# Altium PCB 8bit_RAM.PcbDoc (part 2 of 2)
Units mm, origin at the board's own origin, x right, y up, seen from the top; angles counter-clockwise.
Board outline 237.42 x 196.8 mm, 2 copper layers (Top Layer, Bottom Layer); 76 components, 66 nets, 496 pads, 273 vias.
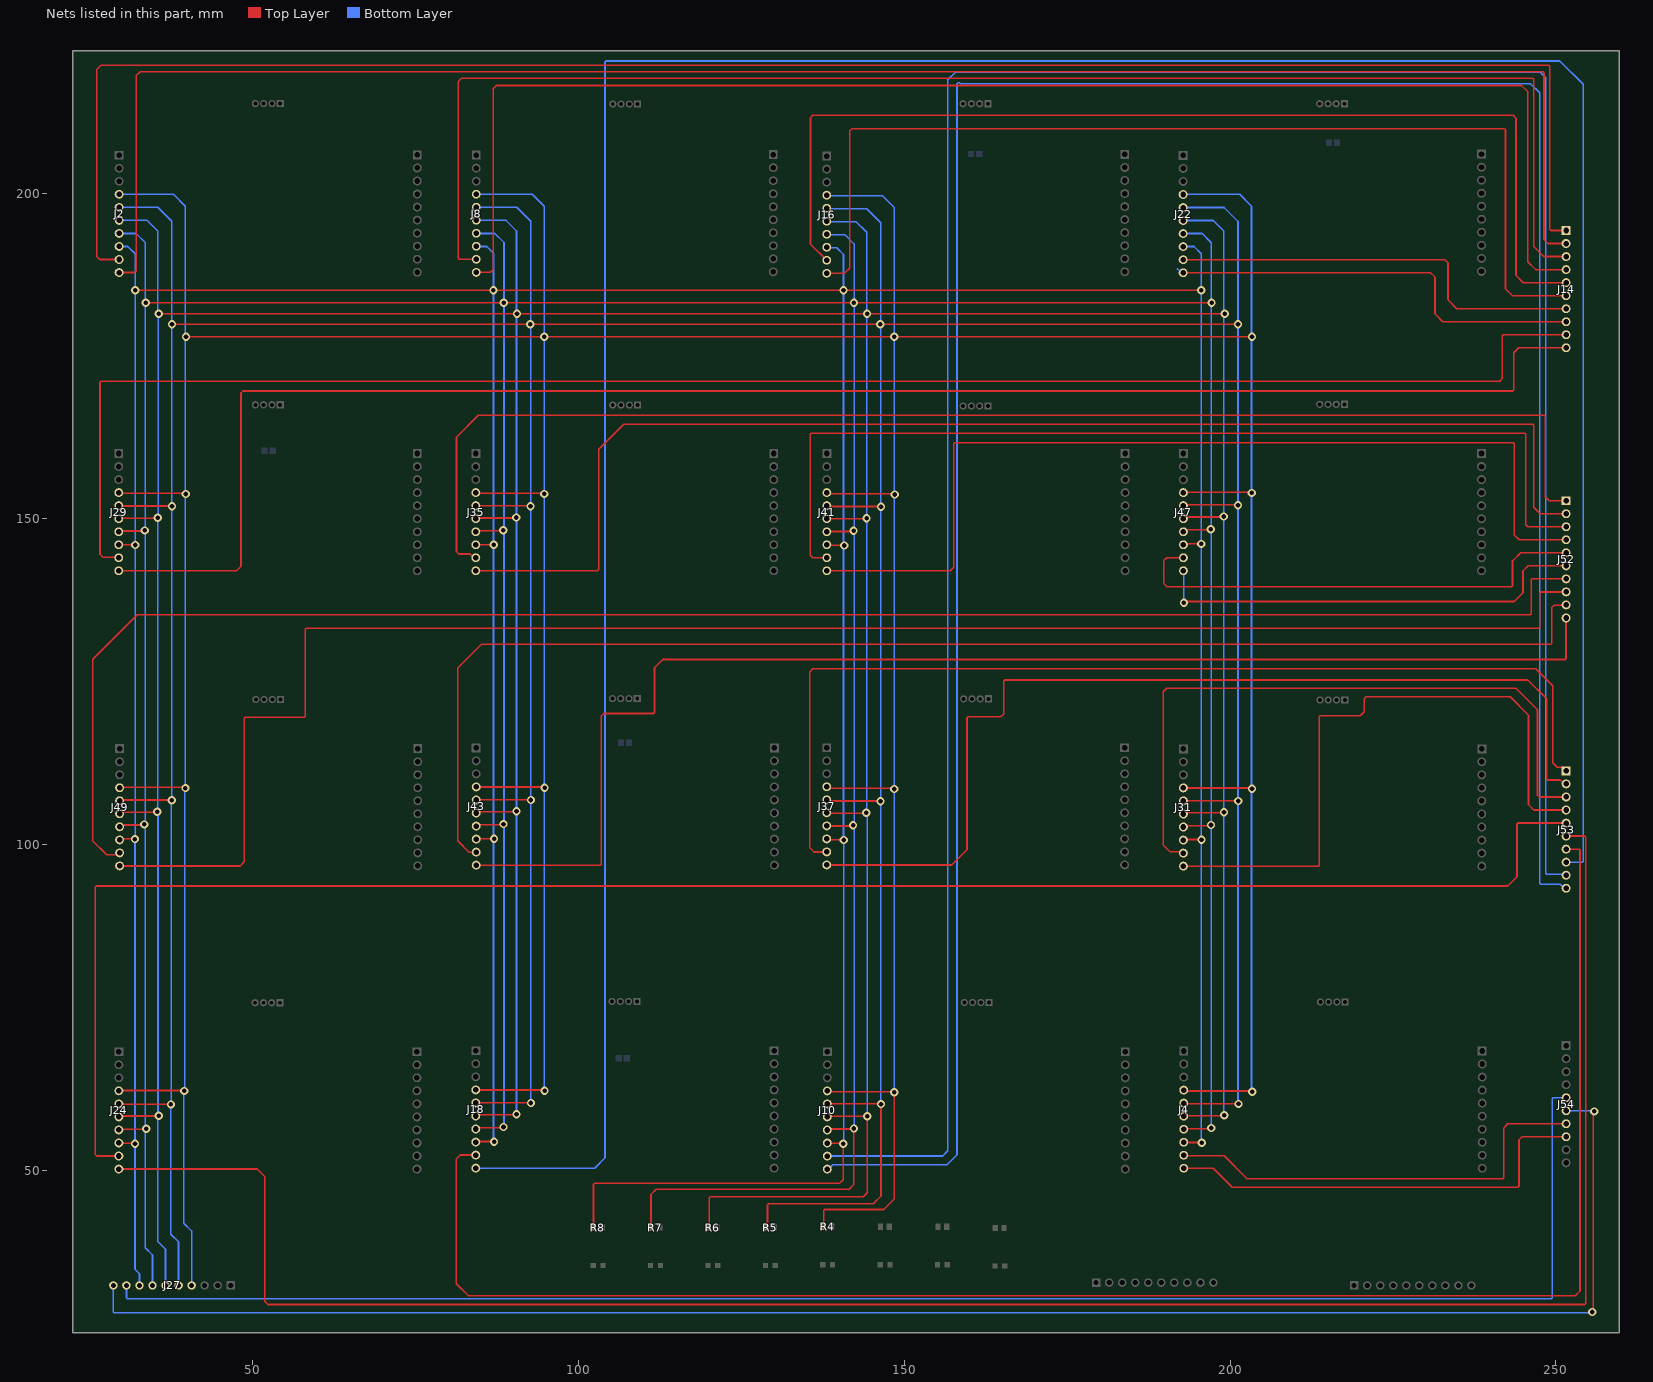
[diagram p2: the nets of this part, all layers, seen from the top]

## Via types
v1: diameter 1.27, hole 0.711, Top Layer to Bottom Layer, 273 vias

## Nets (pads, with @x,y where several pads share a name; then routed paths per layer and width w, separated by ;. In a path a pad name is that pad's centre, name@x,y a point inside that pad or via, vN(x,y) a via of type N, cw(c..) or ccw(c..) an arc to the next point about the centre after c; other vN are vias at no path point) (continued)
Q3: J2.4 J4.4 J8.4 J10.4 J16.4 J18.4 J22.4 J24.4 J27.4 J29.4 J31.4 J35.4 J37.4 J41.4 J43.4 J47.4 J49.4 R4.1 | length 935.7
  Top Layer w0.254: J49.4@29.4,108.9 29.512,108.787 39.563,108.787 v1(39.675,108.675) ; J24.4@29.475,62.2 29.525,62.25 39.45,62.25 v1(39.5,62.2) ; J29.4@29.563,153.913 39.613,153.913 v1(39.725,153.8) ; v1(39.775,177.95) v1(94.75,177.95) v1(148.475,177.95) v1(203.375,177.95) ; J35.4@84.475,154.05 84.587,153.938 94.638,153.938 v1(94.75,153.825) ; J18.4@84.525,62.45 84.637,62.337 94.687,62.337 v1(94.8,62.225) ; J43.4@84.525,108.95 84.637,108.837 94.687,108.837 v1(94.8,108.725) ; R4.1@137.551,41.35 137.625,41.424 137.625,43.851 137.774,44 146.875,44 148.475,45.6 v1(148.475,62) 148.381,62.094 J10.4@137.806,62.094 ; J37.4@138.175,108.75 138.287,108.637 148.338,108.637 v1(148.45,108.525) ; J41.4@138.25,153.95 138.362,153.837 148.413,153.837 v1(148.525,153.725) ; J47.4@193.05,154.2 193.162,154.087 203.212,154.087 v1(203.325,153.975) ; J31.4@193.1,108.8 193.212,108.688 203.262,108.688 v1(203.375,108.575) ; J4.4@193.125,62.3 193.237,62.187 203.288,62.187 v1(203.4,62.075)
  Bottom Layer w0.254: J2.4@29.5,199.8 37.85,199.8 39.675,197.975 v1(39.675,108.675) 39.556,108.556 39.556,62.256 v1(39.5,62.2) 39.438,62.137 39.438,41.887 40.625,40.7 J27.4@40.625,32.339 ; J8.4@84.575,199.8 92.925,199.8 94.75,197.975 v1@94.75,62.281 ; J16.4@138.303,199.593 146.653,199.593 148.478,197.768 v1@148.478,108.525 ; v1(148.45,108.525) 148.462,108.513 148.462,62.013 v1(148.475,62) ; J22.4@193.128,199.793 201.478,199.793 203.303,197.968 v1@203.303,62.131
Q4: J2.5 J4.5 J8.5 J10.5 J16.5 J18.5 J22.5 J24.5 J27.5 J29.5 J31.5 J35.5 J37.5 J41.5 J43.5 J47.5 J49.5 R5.1 | length 904.2
  Top Layer w0.254: J24.5@29.275,60.225 29.325,60.175 37.4,60.175 v1(37.45,60.125) ; J49.5@29.4,106.9 29.45,106.85 37.525,106.85 v1(37.575,106.8) ; J29.5@29.5,151.975 37.575,151.975 v1(37.625,151.925) ; v1(37.625,179.875) v1(92.6,179.875) v1(146.325,179.875) v1(201.225,179.875) ; J35.5@84.475,152.05 84.525,152 92.6,152 v1(92.65,151.95) ; J18.5@84.525,60.45 84.575,60.4 92.65,60.4 v1(92.7,60.35) ; J43.5@84.525,106.95 84.575,106.9 92.65,106.9 v1(92.7,106.85) ; R5.1@128.743,41.225 129.016,41.498 129.016,44.751 129.165,44.9 145.25,44.9 146.425,46.075 v1(146.425,60.175) 146.363,60.238 J10.5@137.737,60.238 ; J37.5@138.175,106.75 138.225,106.7 146.3,106.7 v1(146.35,106.65) ; J41.5@138.25,151.95 138.3,151.9 146.375,151.9 v1(146.425,151.85) ; J47.5@193.05,152.2 193.1,152.15 201.175,152.15 v1(201.225,152.1) ; J31.5@193.1,106.8 193.15,106.75 201.225,106.75 v1(201.275,106.7) ; J4.5@193.125,60.3 193.175,60.25 201.25,60.25 v1(201.3,60.2)
  Bottom Layer w0.254: J2.5@29.5,197.8 35.45,197.8 37.6,195.65 37.6,106.8 37.587,106.787 37.512,106.713 37.512,60.187 v1(37.45,60.125) 37.45,40.2 38.625,39.025 J27.5@38.625,32.339 ; J8.5@84.575,197.8 90.525,197.8 92.675,195.65 v1@92.675,60.35 ; J16.5@138.303,197.593 144.253,197.593 146.403,195.443 146.403,60.197 v1(146.425,60.175) ; J22.5@193.128,197.793 199.078,197.793 201.228,195.643 v1@201.228,60.2
Q5: J2.6 J4.6 J8.6 J10.6 J16.6 J18.6 J22.6 J24.6 J27.6 J29.6 J31.6 J35.6 J37.6 J41.6 J43.6 J47.6 J49.6 R6.1 | length 874.1
  Top Layer w0.254: J24.6@29.35,58.3 29.4,58.35 35.525,58.35 v1(35.575,58.4) ; J49.6@29.4,104.9 29.475,104.975 35.3,104.975 v1(35.375,105.05) ; J29.6@29.525,150.1 35.35,150.1 v1(35.425,150.175) ; v1(35.6,181.475) v1(90.575,181.475) v1(144.3,181.475) v1(199.2,181.475) ; J35.6@84.475,150.05 84.55,150.125 90.375,150.125 v1(90.45,150.2) ; J18.6@84.525,58.45 84.6,58.525 90.425,58.525 v1(90.5,58.6) ; J43.6@84.525,104.95 84.6,105.025 90.425,105.025 v1(90.5,105.1) ; R6.1@119.935,41.225 120.1,41.39 120.1,45.826 120.249,45.975 143.725,45.975 144.325,46.575 v1(144.325,58.325) 144.312,58.313 137.737,58.313 J10.6@137.725,58.325 ; J37.6@138.175,104.75 138.25,104.825 144.075,104.825 v1(144.15,104.9) ; J41.6@138.25,149.95 138.325,150.025 144.15,150.025 v1(144.225,150.1) ; J47.6@193.05,150.2 193.125,150.275 198.95,150.275 v1(199.025,150.35) ; J31.6@193.1,104.8 193.175,104.875 199,104.875 v1(199.075,104.95) ; J4.6@193.125,58.3 193.2,58.375 199.025,58.375 v1(199.1,58.45)
  Bottom Layer w0.254: J2.6@29.5,195.8 33.8,195.8 35.425,194.175 35.425,181.475 35.513,181.387 35.513,150.262 v1(35.425,150.175) 35.425,105.05 35.475,105 35.475,58.5 v1(35.575,58.4) 35.425,58.25 35.425,39.075 36.625,37.875 J27.6@36.625,32.339 ; J8.6@84.575,195.8 88.875,195.8 90.5,194.175 v1@90.5,150.25 ; v1(90.45,150.2) v1@90.5,150.25 ; v1(90.5,58.6) v1(90.5,105.1) v1@90.5,150.25 ; v1@90.537,150.287 v1@90.5,150.25 ; J16.6@138.303,195.593 142.603,195.593 144.228,193.968 v1@144.228,150.103 ; v1(144.225,150.1) v1@144.228,150.103 ; v1@144.312,150.188 v1@144.228,150.103 ; v1@144.325,58.55 144.325,104.725 v1(144.15,104.9) 144.228,104.978 v1@144.228,150.103 ; J22.6@193.128,195.793 197.428,195.793 199.053,194.168 v1@199.053,150.378 ; v1(199.025,150.35) v1@199.053,150.378 ; v1@199.053,58.45 v1@199.053,150.378 ; v1(199.075,104.95) v1@199.163,105.037 ; v1(199.1,58.45) v1@199.188,58.538 ; v1@199.112,150.437 v1@199.053,150.378
Q6: J2.7 J4.7 J8.7 J10.7 J16.7 J18.7 J22.7 J24.7 J27.7 J29.7 J31.7 J35.7 J37.7 J41.7 J43.7 J47.7 J49.7 R7.1 | length 844.9
  Top Layer w0.254: J24.7@29.375,56.325 29.387,56.338 33.638,56.338 v1(33.675,56.375) ; J49.7@29.4,102.9 29.5,103 33.275,103 v1(33.375,103.1) ; J29.7@29.55,148.125 33.325,148.125 v1(33.425,148.225) ; v1(33.575,183.175) v1(88.55,183.175) v1(142.275,183.175) v1(197.175,183.175) ; J35.7@84.475,148.05 84.575,148.15 88.35,148.15 v1(88.45,148.25) ; J18.7@84.525,56.45 84.625,56.55 88.4,56.55 v1(88.5,56.65) ; J43.7@84.525,102.95 84.625,103.05 88.4,103.05 v1(88.5,103.15) ; R7.1@111.128,41.225 111.128,46.303 111.925,47.1 141.55,47.1 142.275,47.825 v1(142.275,56.425) 142.213,56.362 137.762,56.362 J10.7@137.75,56.35 ; J37.7@138.175,102.75 138.275,102.85 142.05,102.85 v1(142.15,102.95) ; J41.7@138.25,147.95 138.35,148.05 142.125,148.05 v1(142.225,148.15) ; J47.7@193.05,148.2 193.15,148.3 196.925,148.3 v1(197.025,148.4) ; J31.7@193.1,102.8 193.2,102.9 196.975,102.9 v1(197.075,103) ; J4.7@193.125,56.3 193.225,56.4 197,56.4 v1(197.1,56.5)
  Bottom Layer w0.254: J2.7@29.5,193.8 32.1,193.8 33.5,192.4 33.5,103.1 33.525,103.075 33.525,56.525 v1(33.675,56.375) 33.5,56.2 33.5,38.15 34.625,37.025 J27.7@34.625,32.339 ; J8.7@84.575,193.8 87.175,193.8 88.575,192.4 v1@88.575,56.6 ; J16.7@138.303,193.593 140.903,193.593 142.303,192.193 v1@142.303,56.362 ; J22.7@193.128,193.793 195.728,193.793 197.128,192.393 v1@197.128,56.5
Q7: J2.8 J4.8 J8.8 J10.8 J16.8 J18.8 J22.8 J24.8 J27.8 J29.8 J31.8 J35.8 J37.8 J41.8 J43.8 J47.8 J49.8 R8.1 | length 824.8
  Top Layer w0.254: J24.8@29.3,54.2 29.312,54.187 31.837,54.187 v1(31.95,54.075) ; J49.8@29.4,100.9 29.425,100.875 31.9,100.875 v1(31.925,100.85) ; J29.8@29.475,146 31.95,146 v1(31.975,145.975) ; v1(31.975,185.1) v1(86.95,185.1) v1(140.675,185.1) v1(195.575,185.1) ; J35.8@84.475,146.05 84.5,146.025 86.975,146.025 v1(87,146) ; J18.8@84.525,54.45 84.55,54.425 v1@87.025,54.425 ; J43.8@84.525,100.95 84.55,100.925 87.025,100.925 v1(87.05,100.9) ; R8.1@102.32,41.225 102.32,47.871 102.468,48.02 140.07,48.02 140.625,48.575 v1(140.625,54.075) 140.512,54.187 J10.8@137.713,54.187 ; J37.8@138.175,100.75 138.2,100.725 140.675,100.725 v1(140.7,100.7) ; J41.8@138.25,145.95 138.275,145.925 140.75,145.925 v1(140.775,145.9) ; J47.8@193.05,146.2 193.075,146.175 195.55,146.175 v1(195.575,146.15) ; J31.8@193.1,100.8 193.125,100.775 195.6,100.775 v1(195.625,100.75) ; J4.8@193.125,54.3 193.15,54.275 195.625,54.275 v1(195.65,54.25)
  Bottom Layer w0.254: J2.8@29.5,191.8 30.85,191.8 31.975,190.675 v1(31.975,185.1) v1(31.975,145.975) 31.975,100.85 31.938,100.812 31.938,54.088 v1(31.95,54.075) 31.95,34.825 32.625,34.15 J27.8@32.625,32.339 ; J8.8@84.575,191.8 85.925,191.8 86.95,190.775 v1(86.95,185.1) v1@86.95,54.4 ; J16.8@138.303,191.593 139.653,191.593 140.675,190.57 v1(140.675,185.1) v1@140.675,100.7 ; v1@140.7,54.075 v1(140.7,100.7) ; J22.8@193.128,191.793 194.478,191.793 195.575,190.695 v1(195.575,185.1) v1(195.575,146.15) v1@195.575,54.275
  other v1: 87.05,54.4
RE: J27.9 J54.5 | length 253.6
  Bottom Layer w0.254: J27.9@30.625,32.339 30.625,30.449 30.774,30.3 249.326,30.3 249.475,30.449 249.475,61.003 249.624,61.152 J54.5@251.575,61.152
RE0: J2.9 J14.1 | length 283.3
  Top Layer w0.254: J2.9@29.5,189.8 26.525,189.8 26.075,190.25 26.075,218.975 26.725,219.625 248.901,219.625 249.05,219.476 249.05,194.454 249.252,194.252 J14.1@251.575,194.252
RE1: J8.9 J14.3 | length 226.6
  Top Layer w0.254: J8.9@84.325,189.825 81.699,189.825 81.55,189.974 81.55,217.125 82.05,217.625 246.45,217.625 246.6,217.475 246.6,191.8 248.148,190.252 J14.3@251.575,190.252
RE2: J14.5 J16.9 | length 163.8
  Top Layer w0.254: J16.9@138.1,189.675 135.625,192.15 135.625,211.575 135.975,211.925 243.475,211.925 243.9,211.5 243.9,187.375 245.023,186.252 J14.5@251.575,186.252
RE3: J14.7 J22.9 | length 65.5
  Top Layer w0.254: J22.9@192.8,189.775 233,189.775 233.45,189.325 233.45,183.624 234.822,182.252 J14.7@251.575,182.252
  Bottom Layer w0.254: J22.9@192.6,189.975 J22.9@192.8,189.775
RE4: J14.9 J29.9 | length 261.4
  Top Layer w0.254: J29.9@29.45,144.025 29.35,144.125 27.025,144.125 26.575,144.575 26.575,170.976 26.724,171.125 241.401,171.125 241.8,171.524 241.8,178.103 241.949,178.252 J14.9@251.575,178.252
RE5: J35.9 J52.1 | length 205.3
  Top Layer w0.254: J35.9@84.25,144.025 83.951,144.025 83.371,144.605 81.644,144.605 81.275,144.974 81.275,162.525 84.625,165.875 248.251,165.875 248.4,165.726 248.4,153.375 248.994,152.781 J52.1@251.575,152.781
RE6: J41.9 J52.3 | length 151.4
  Top Layer w0.254: J41.9@138.125,144.025 135.975,144.025 135.575,144.425 135.575,163.001 135.724,163.15 245.226,163.15 245.375,163.001 245.375,149.112 245.706,148.781 J52.3@251.575,148.781
RE7: J47.9 J52.5 | length 73.1
  Top Layer w0.254: J47.9@192.85,144.025 190.275,144.025 189.85,143.6 189.85,140.075 190.375,139.55 243.201,139.55 243.35,139.699 243.35,143.542 243.408,143.6 243.425,143.6 244.606,144.781 J52.5@251.575,144.781
RE8: J49.9 J52.7 | length 267.3
  Top Layer w0.254: J49.9@29.575,98.725 29.275,98.425 27.6,98.425 25.475,100.55 25.475,128.444 32.306,135.275 246.076,135.275 246.225,135.424 246.225,140.632 246.374,140.781 J52.7@251.575,140.781
RE9: J43.9 J52.9 | length 207.4
  Top Layer w0.254: J43.9@84.3,98.85 83.2,98.85 81.475,100.575 81.475,127.1 85.125,130.75 249.251,130.75 249.4,130.899 249.4,136.4 249.75,136.75 251.544,136.75 J52.9@251.575,136.781
RE10: J37.9 J53.1 | length 159.5
  Top Layer w0.254: J37.9@138.1,98.875 136.15,98.875 135.525,99.5 135.525,126.525 135.975,126.975 246.925,126.975 249.525,124.375 249.525,112.55 250.213,111.862 251.023,111.862 J53.1@251.575,111.31
RE11: J31.9 J53.3 | length 103.8
  Top Layer w0.254: J31.9@192.85,98.7 192.65,98.9 190.8,98.9 189.75,99.95 189.75,123.45 190.275,123.975 243.9,123.975 247.2,120.675 247.2,107.55 247.44,107.31 J53.3@251.575,107.31
RE12: J24.9 J53.5 | length 279.3
  Top Layer w0.254: J24.9@29.466,52.207 26.068,52.207 25.85,52.425 25.85,93.501 25.999,93.65 242.65,93.65 244.05,95.05 244.05,103.161 244.199,103.31 J53.5@251.575,103.31
RE13: J18.9 J53.7 | length 265.8
  Top Layer w0.254: J18.9@84.25,52.35 81.85,52.35 81.25,51.75 81.25,32.625 83.125,30.75 253,30.75 253.725,31.475 253.725,99.161 253.576,99.31 J53.7@251.575,99.31
RE14: J10.9 J53.9 | length 401.1
  Bottom Layer w0.254: J10.9@138.2,52.2 155.9,52.2 156.7,53 156.7,217.375 157.875,218.55 247.6,218.55 248.45,217.7 248.45,95.6 248.6,95.45 251.435,95.45 J53.9@251.575,95.31
RE15: J4.9 J54.7 | length 68.1
  Top Layer w0.254: J4.9@192.9,52.325 193,52.225 199.1,52.225 202.6,48.725 241.851,48.725 242,48.874 242,56.517 242.635,57.152 J54.7@251.575,57.152
WE: J27.10 J54.6 | length 266.4
  Top Layer w0.254: v1(255.6,28.275) 255.75,28.425 255.75,58.9 v1(255.9,59.05)
  Bottom Layer w0.254: J27.10@28.625,32.339 28.625,28.274 28.774,28.125 v1@255.6,28.125 ; J54.6@251.575,59.152 v1@255.948,59.152
WE0: J2.10 J14.2 | length 278.3
  Top Layer w0.254: J2.10@29.5,187.8 31.875,187.8 32.15,188.075 32.15,218.05 32.725,218.625 248.051,218.625 248.2,218.476 248.2,192.85 248.798,192.252 J14.2@251.575,192.252
WE1: J8.10 J14.4 | length 222.4
  Top Layer w0.254: J8.10@84.325,187.825 86.475,187.825 86.925,188.275 86.925,216.025 87.4,216.5 244.75,216.5 245.675,215.575 245.675,189.475 246.898,188.252 J14.4@251.575,188.252
WE2: J14.6 J16.10 | length 159.9
  Top Layer w0.254: J16.10@138.1,187.675 140.825,187.675 141.625,188.475 141.625,209.525 141.975,209.875 242.126,209.875 242.275,209.726 242.275,185.325 243.348,184.252 J14.6@251.575,184.252
WE3: J14.8 J22.10 | length 66.3
  Top Layer w0.254: J22.10@192.8,187.775 230.776,187.775 231.45,187.101 231.45,181.475 232.673,180.252 J14.8@251.575,180.252
  Bottom Layer w0.254: 191.931,188.345 192.501,187.775 J22.10@192.8,187.775
WE4: J14.10 J29.10 | length 255.2
  Top Layer w0.254: J29.10@29.45,142.025 47.525,142.025 48.2,142.7 48.2,169.3 48.525,169.625 243.401,169.625 243.55,169.774 243.55,175.475 244.327,176.252 J14.10@251.575,176.252
WE5: J35.10 J52.2 | length 200.5
  Top Layer w0.254: J35.10@84.25,142.025 102.875,142.025 103.1,142.25 103.1,160.675 106.95,164.525 246.451,164.525 246.6,164.376 246.6,151.774 247.593,150.781 J52.2@251.575,150.781
WE6: J41.10 J52.4 | length 147.1
  Top Layer w0.254: J41.10@138.125,142.025 157.05,142.025 157.6,142.575 157.6,161.551 157.749,161.7 243.476,161.7 243.625,161.551 243.625,147.525 244.369,146.781 J52.4@251.575,146.781
WE7: J47.10 J52.6 | length 67.9
  Top Layer w0.254: v1@192.8,137.3 243.6,137.3 244.975,138.675 244.975,142 245.756,142.781 J52.6@251.575,142.781
  Bottom Layer w0.254: J47.10@192.85,142.025 192.888,141.988 192.888,137.162 v1(192.925,137.125)
WE8: J49.10 J52.8 | length 263.3
  Top Layer w0.254: J49.10@29.575,96.725 48.1,96.725 48.725,97.35 48.725,119.376 48.874,119.525 57.926,119.525 58.075,119.674 58.075,133.076 58.224,133.225 247.401,133.225 247.55,133.374 247.55,138.632 247.699,138.781 J52.8@251.575,138.781
WE9: J43.10 J52.10 | length 204
  Top Layer w0.254: J43.10@84.3,96.85 103.376,96.85 103.525,96.999 103.525,119.75 103.9,120.125 111.526,120.125 111.675,120.274 111.675,127.125 112.95,128.4 251.426,128.4 251.575,128.549 J52.10@251.575,134.781
WE10: J37.10 J53.2 | length 153.9
  Top Layer w0.254: J37.10@138.1,96.875 157.275,96.875 159.625,99.225 159.625,119.451 159.774,119.6 164.825,119.6 165.3,120.075 165.3,125.125 165.45,125.275 245.7,125.275 248.6,122.375 248.6,110.074 248.749,109.925 250.691,109.925 251.307,109.31 J53.2@251.575,109.31
WE11: J31.10 J53.4 | length 99.2
  Top Layer w0.254: J31.10@192.85,96.7 213.526,96.7 213.675,96.849 213.675,119.651 213.824,119.8 220,119.8 220.6,120.4 220.6,122.4 220.875,122.675 243,122.675 245.8,119.875 245.8,106.15 246.64,105.31 J53.4@251.575,105.31
WE12: J24.10 J53.6 | length 319.7
  Top Layer w0.254: J24.10@29.466,50.207 50.693,50.207 51.85,49.05 51.85,29.925 52.35,29.425 254.451,29.425 254.6,29.574 254.6,101.161 254.451,101.31 J53.6@251.575,101.31
WE13: J18.10 J53.8 | length 462.3
  Bottom Layer w0.254: J18.10@84.25,50.35 102.5,50.35 104.075,51.925 104.075,220.126 104.224,220.275 250.625,220.275 254.2,216.7 254.2,97.458 254.051,97.31 J53.8@251.575,97.31
WE14: J10.10 J53.10 | length 401
  Bottom Layer w0.254: J10.10@138.2,50.2 138.399,50.2 139.049,50.85 156.55,50.85 158.1,52.4 158.1,216.792 158.249,216.941 158.459,216.941 158.625,216.775 246.125,216.775 247.525,215.375 247.525,94.049 247.674,93.9 250.686,93.9 251.276,93.31 J53.10@251.575,93.31
WE15: J4.10 J54.8 | length 67.2
  Top Layer w0.254: J4.10@192.9,50.325 197.425,50.325 200.325,47.425 244.201,47.425 244.35,47.574 244.35,54.675 244.827,55.152 J54.8@251.575,55.152
pads on no net: J5.2 J5.3 J6.2 J6.3 J12.2 J12.3 J13.2 J13.3 J19.2 J19.3 J20.2 J20.3 J25.2 J25.3 J26.2 J26.3 J32.2 J32.3 J33.2 J33.3 J38.2 J38.3 J39.2 J39.3 J44.2 J44.3 J45.2 J45.3 J50.2 J50.3 J51.2 J51.3 J55.5 J55.6 J55.7 J55.8

## Polygon pours and split planes (outlines as drawn)
GND on Top Layer "NONET_L01_P-001" (solid, pour order 0): 22.35,221.875 259.775,221.875 259.775,25.075 22.35,25.163
+5 on Bottom Layer "NONET_L01_P-001" (solid, pour order 2): 259.775,25.075 259.775,221.875 22.35,221.875 22.35,25.075

## Silkscreen, mask and mechanical layers (free items; w line width, h text height)
Top Overlay:
  lines w0.254: 27.35,38.8 77.35,38.8 77.35,78.8 27.35,78.8 27.35,38.8 ; 27.35,85.3 77.35,85.3 77.35,125.3 27.35,125.3 27.35,85.3 ; 27.35,130.5 77.35,130.5 77.35,170.5 27.35,170.5 27.35,130.5 ; 27.375,176.525 77.375,176.525 77.375,216.525 27.375,216.525 27.375,176.525 ; 82.1,176.7 132.1,176.7 132.1,216.7 82.1,216.7 82.1,176.7 ; 82.125,38.65 132.125,38.65 132.125,78.65 82.125,78.65 82.125,38.65 ; 82.125,85.15 132.125,85.15 132.125,125.15 82.125,125.15 82.125,85.15 ; 82.125,130.575 132.125,130.575 132.125,170.575 82.125,170.575 82.125,130.575 ; 135.95,176.525 185.95,176.525 185.95,216.525 135.95,216.525 135.95,176.525 ; 136,38.85 186,38.85 186,78.85 136,78.85 136,38.85 ; 136,130.575 186,130.575 186,170.575 136,170.575 136,130.575 ; 136.025,85.275 186.025,85.275 186.025,125.275 136.025,125.275 136.025,85.275 ; 190.725,38.85 240.725,38.85 240.725,78.85 190.725,78.85 190.725,38.85 ; 190.725,85.275 240.725,85.275 240.725,125.275 190.725,125.275 190.725,85.275 ; 190.725,130.575 240.725,130.575 240.725,170.575 190.725,170.575 190.725,130.575 ; 190.725,176.525 240.725,176.525 240.725,216.525 190.725,216.525 190.725,176.525
  text "+5V" at 214.671,208.054 h1.52 r90
  text "GND" at 218.596,207.954 h1.52 r90
  text "+5V" at 106.096,207.754 h1.52 r90
  text "GND" at 110.021,207.654 h1.52 r90
  text "+5V" at 159.846,207.479 h1.52 r90
  text "GND" at 163.771,207.379 h1.52 r90
  text "+5V" at 51.096,207.154 h1.52 r90
  text "GND" at 55.021,207.054 h1.52 r90
  text "D0" at 178.654,205.629 h1.3
  text "D0" at 70.104,205.529 h1.3
  text "D0" at 233.529,205.354 h1.3
  text "Q0" at 139.429,205.329 h1.3
  text "D0" at 124.804,205.254 h1.3
  text "Q0" at 30.879,205.229 h1.3
  text "Q0" at 194.304,205.054 h1.3
  text "Q0" at 85.579,204.954 h1.3
  text "D1" at 178.654,203.607 h1.3
  text "D1" at 70.104,203.507 h1.3
  text "D1" at 233.529,203.332 h1.3
  text "Q1" at 139.429,203.297 h1.3
  text "D1" at 124.804,203.232 h1.3
  text "Q1" at 30.879,203.197 h1.3
  text "Q1" at 194.304,203.022 h1.3
  text "Q1" at 85.579,202.922 h1.3
  text "D2" at 178.654,201.585 h1.3
  text "D2" at 70.104,201.485 h1.3
  text "D2" at 233.529,201.31 h1.3
  text "Q2" at 139.429,201.265 h1.3
  text "D2" at 124.804,201.21 h1.3
  text "Q2" at 30.879,201.165 h1.3
  text "Q2" at 194.304,200.99 h1.3
  text "Q2" at 85.579,200.89 h1.3
  text "D3" at 178.654,199.562 h1.3
  text "D3" at 70.104,199.462 h1.3
  text "D3" at 233.529,199.287 h1.3
  text "Q3" at 139.429,199.233 h1.3
  text "D3" at 124.804,199.187 h1.3
  text "Q3" at 30.879,199.133 h1.3
  text "Q3" at 194.304,198.958 h1.3
  text "Q3" at 85.579,198.858 h1.3
  text "D4" at 178.654,197.54 h1.3
  text "D4" at 70.104,197.44 h1.3
  text "D4" at 233.529,197.265 h1.3
  text "Q4" at 139.429,197.2 h1.3
  text "D4" at 124.804,197.165 h1.3
  text "Q4" at 30.879,197.1 h1.3
  text "Q4" at 194.304,196.925 h1.3
  text "Q4" at 85.579,196.825 h1.3
  text "D5" at 178.654,195.518 h1.3
  text "D5" at 70.104,195.418 h1.3
  text "D5" at 233.529,195.243 h1.3
  text "Q5" at 139.429,195.168 h1.3
  text "D5" at 124.804,195.143 h1.3
  text "Q5" at 30.879,195.068 h1.3
  text "Q5" at 194.304,194.893 h1.3
  text "Q5" at 85.579,194.793 h1.3
  text "RE0" at 245.179,193.679 h1.52
  text "D6" at 178.654,193.496 h1.3
  text "D6" at 70.104,193.396 h1.3
  text "D6" at 233.529,193.221 h1.3
  text "Q6" at 139.429,193.136 h1.3
  text "D6" at 124.804,193.121 h1.3
  text "Q6" at 30.879,193.036 h1.3
  text "Q6" at 194.304,192.861 h1.3
  text "Q6" at 85.579,192.761 h1.3
  text "WE0" at 245.179,191.554 h1.52
  text "D7" at 178.654,191.473 h1.3
  text "D7" at 70.104,191.373 h1.3
  text "D7" at 233.529,191.198 h1.3
  text "D7" at 124.804,191.098 h1.3
  text "Q7" at 139.429,191.104 h1.3
  text "Q7" at 30.879,191.004 h1.3
  text "Q7" at 194.304,190.829 h1.3
  text "Q7" at 85.579,190.729 h1.3
  text "CLK" at 178.654,189.451 h1.3
  text "RE" at 139.404,189.404 h1.3
  text "RE1" at 245.179,189.404 h1.52
  text "CLK" at 70.104,189.351 h1.3
  text "RE" at 30.854,189.304 h1.3
  text "CLK" at 233.529,189.176 h1.3
  text "RE" at 194.279,189.129 h1.3
  text "CLK" at 124.804,189.076 h1.3
  text "RE" at 85.554,189.029 h1.3
  text "WE" at 139.379,187.504 h1.3
  text "WE1" at 245.179,187.454 h1.52
  text "CLR" at 178.654,187.429 h1.3
  text "WE" at 30.829,187.404 h1.3
  text "CLR" at 70.104,187.329 h1.3
  text "WE" at 194.254,187.229 h1.3
  text "CLR" at 233.529,187.154 h1.3
  text "WE" at 85.529,187.129 h1.3
  text "CLR" at 124.804,187.054 h1.3
  text "RE2" at 245.179,185.454 h1.52
  text "WE2" at 245.179,183.354 h1.52
  text "RE3" at 245.179,181.429 h1.52
  text "WE3" at 245.179,179.629 h1.52
  text "RE4" at 245.179,177.554 h1.52
  text "WE4" at 245.179,175.629 h1.52
  text "8bit register 5" at 45.479,172.237 h1.52
  text "8bit register 7" at 150.204,172.237 h1.52
  text "8bit register 8" at 207.354,172.237 h1.52
  text "8bit register 6" at 103.229,171.637 h1.52
  text "+5V" at 214.896,162.129 h1.52 r90
  text "GND" at 218.821,162.029 h1.52 r90
  text "+5V" at 106.321,161.829 h1.52 r90
  text "GND" at 110.246,161.729 h1.52 r90
  text "+5V" at 160.071,161.554 h1.52 r90
  text "GND" at 163.996,161.454 h1.52 r90
  text "+5V" at 51.321,161.229 h1.52 r90
  text "GND" at 55.246,161.129 h1.52 r90
  text "D0" at 70.479,159.779 h1.3
  text "D0" at 233.529,159.604 h1.3
  text "D0" at 124.979,159.504 h1.3
  text "D0" at 178.754,159.504 h1.3
  text "Q0" at 31.254,159.479 h1.3
  text "Q0" at 194.304,159.304 h1.3
  text "Q0" at 85.954,159.229 h1.3
  text "Q0" at 139.779,159.229 h1.3
  text "D1" at 70.479,157.757 h1.3
  text "D1" at 233.529,157.582 h1.3
  text "D1" at 124.979,157.482 h1.3
  text "D1" at 178.754,157.482 h1.3
  text "Q1" at 31.254,157.447 h1.3
  text "Q1" at 194.304,157.272 h1.3
  text "Q1" at 85.954,157.197 h1.3
  text "Q1" at 139.779,157.197 h1.3
  text "D2" at 70.479,155.735 h1.3
  text "D2" at 233.529,155.56 h1.3
  text "D2" at 124.979,155.46 h1.3
  text "D2" at 178.754,155.46 h1.3
  text "Q2" at 31.254,155.415 h1.3
  text "Q2" at 194.304,155.24 h1.3
  text "Q2" at 85.954,155.165 h1.3
  text "Q2" at 139.779,155.165 h1.3
  text "D3" at 70.479,153.712 h1.3
  text "D3" at 233.529,153.537 h1.3
  text "D3" at 124.979,153.437 h1.3
  text "D3" at 178.754,153.437 h1.3
  text "Q3" at 31.254,153.383 h1.3
  text "Q3" at 194.304,153.208 h1.3
  text "Q3" at 85.954,153.133 h1.3
  text "Q3" at 139.779,153.133 h1.3
  text "RE5" at 244.954,152.254 h1.52
  text "D4" at 70.479,151.69 h1.3
  text "D4" at 233.529,151.515 h1.3
  text "D4" at 124.979,151.415 h1.3
  text "D4" at 178.754,151.415 h1.3
  text "Q4" at 31.254,151.35 h1.3
  text "Q4" at 194.304,151.175 h1.3
  text "Q4" at 85.954,151.1 h1.3
  text "Q4" at 139.779,151.1 h1.3
  text "WE5" at 244.954,150.129 h1.52
  text "D5" at 70.479,149.668 h1.3
  text "D5" at 233.529,149.493 h1.3
  text "D5" at 124.979,149.393 h1.3
  text "D5" at 178.754,149.393 h1.3
  text "Q5" at 31.254,149.318 h1.3
  text "Q5" at 194.304,149.143 h1.3
  text "Q5" at 85.954,149.068 h1.3
  text "Q5" at 139.779,149.068 h1.3
  text "RE6" at 244.954,147.979 h1.52
  text "D6" at 70.479,147.646 h1.3
  text "D6" at 233.529,147.471 h1.3
  text "D6" at 124.979,147.371 h1.3
  text "D6" at 178.754,147.371 h1.3
  text "Q6" at 31.254,147.286 h1.3
  text "Q6" at 194.304,147.111 h1.3
  text "Q6" at 85.954,147.036 h1.3
  text "Q6" at 139.779,147.036 h1.3
  text "WE2" at 244.954,146.029 h1.52
  text "D7" at 70.479,145.623 h1.3
  text "D7" at 233.529,145.448 h1.3
  text "D7" at 124.979,145.348 h1.3
  text "D7" at 178.754,145.348 h1.3
  text "Q7" at 31.254,145.254 h1.3
  text "Q7" at 194.304,145.079 h1.3
  text "Q7" at 85.954,145.004 h1.3
  text "Q7" at 139.779,145.004 h1.3
  text "RE7" at 244.954,144.029 h1.52
  text "RE" at 31.229,143.554 h1.3
  text "CLK" at 70.129,143.554 h1.3
  text "CLK" at 233.529,143.426 h1.3
  text "RE" at 194.279,143.379 h1.3
  text "CLK" at 124.829,143.354 h1.3
  text "CLK" at 178.754,143.326 h1.3
  text "RE" at 85.929,143.304 h1.3
  text "RE" at 139.754,143.304 h1.3
  text "WE7" at 244.954,141.929 h1.52
  text "WE" at 31.204,141.654 h1.3
  text "CLR" at 70.129,141.579 h1.3
  text "WE" at 194.254,141.479 h1.3
  text "WE" at 85.904,141.404 h1.3
  text "WE" at 139.729,141.404 h1.3
  text "CLR" at 233.529,141.404 h1.3
  text "CLR" at 124.829,141.304 h1.3
  text "CLR" at 178.754,141.304 h1.3
  text "RE8" at 244.954,140.004 h1.52
  text "WE8" at 244.954,138.204 h1.52
  text "RE9" at 244.954,136.129 h1.52
  text "WE9" at 244.954,134.204 h1.52
  text "8bit register 10" at 98.829,127.387 h1.52
  text "8bit register 11" at 150.754,127.387 h1.52
  text "8bit register 9" at 42.529,127.087 h1.52
  text "8bit register 12" at 202.229,126.787 h1.52
  text "+5V" at 214.896,117.229 h1.52 r90
  text "GND" at 218.821,117.129 h1.52 r90
  text "+5V" at 106.321,116.929 h1.52 r90
  text "GND" at 110.246,116.829 h1.52 r90
  text "+5V" at 160.071,116.654 h1.52 r90
  text "GND" at 163.996,116.554 h1.52 r90
  text "+5V" at 51.321,116.329 h1.52 r90
  text "GND" at 55.246,116.229 h1.52 r90
  text "D0" at 178.929,114.604 h1.3
  text "D0" at 125.079,114.329 h1.3
  text "Q0" at 139.704,114.304 h1.3
  text "D0" at 70.304,114.229 h1.3
  text "D0" at 233.804,114.229 h1.3
  text "Q0" at 85.854,114.029 h1.3
  text "Q0" at 31.079,113.929 h1.3
  text "Q0" at 194.579,113.929 h1.3
  text "D1" at 178.929,112.582 h1.3
  text "D1" at 125.079,112.307 h1.3
  text "Q1" at 139.704,112.272 h1.3
  text "D1" at 70.304,112.207 h1.3
  text "D1" at 233.804,112.207 h1.3
  text "Q1" at 85.854,111.997 h1.3
  text "Q1" at 31.079,111.897 h1.3
  text "Q1" at 194.579,111.897 h1.3
  text "RE10" at 244.129,110.779 h1.52
  text "D2" at 178.929,110.56 h1.3
  text "D2" at 125.079,110.285 h1.3
  text "Q2" at 139.704,110.24 h1.3
  text "D2" at 70.304,110.185 h1.3
  text "D2" at 233.804,110.185 h1.3
  text "Q2" at 85.854,109.965 h1.3
  text "Q2" at 31.079,109.865 h1.3
  text "Q2" at 194.579,109.865 h1.3
  text "WE10" at 244.129,108.654 h1.52
  text "D3" at 178.929,108.537 h1.3
  text "D3" at 125.079,108.262 h1.3
  text "Q3" at 139.704,108.208 h1.3
  text "D3" at 70.304,108.162 h1.3
  text "D3" at 233.804,108.162 h1.3
  text "Q3" at 85.854,107.933 h1.3
  text "Q3" at 31.079,107.833 h1.3
  text "Q3" at 194.579,107.833 h1.3
  text "D4" at 178.929,106.515 h1.3
  text "RE11" at 244.129,106.504 h1.52
  text "D4" at 125.079,106.24 h1.3
  text "Q4" at 139.704,106.175 h1.3
  text "D4" at 70.304,106.14 h1.3
  text "D4" at 233.804,106.14 h1.3
  text "Q4" at 85.854,105.9 h1.3
  text "Q4" at 31.079,105.8 h1.3
  text "Q4" at 194.579,105.8 h1.3
  text "WE11" at 244.129,104.554 h1.52
  text "D5" at 178.929,104.493 h1.3
  text "D5" at 125.079,104.218 h1.3
  text "Q5" at 139.704,104.143 h1.3
  text "D5" at 70.304,104.118 h1.3
  text "D5" at 233.804,104.118 h1.3
  text "Q5" at 85.854,103.868 h1.3
  text "Q5" at 31.079,103.768 h1.3
  text "Q5" at 194.579,103.768 h1.3
  text "RE12" at 244.129,102.554 h1.52
  text "D6" at 178.929,102.471 h1.3
  text "D6" at 125.079,102.196 h1.3
  text "D6" at 70.304,102.096 h1.3
  text "Q6" at 139.704,102.111 h1.3
  text "D6" at 233.804,102.096 h1.3
  text "Q6" at 85.854,101.836 h1.3
  text "Q6" at 31.079,101.736 h1.3
  text "Q6" at 194.579,101.736 h1.3
  text "D7" at 178.929,100.448 h1.3
  text "WE12" at 244.129,100.454 h1.52
  text "D7" at 125.079,100.173 h1.3
  text "D7" at 70.304,100.073 h1.3
  text "Q7" at 139.704,100.079 h1.3
  text "D7" at 233.804,100.073 h1.3
  text "Q7" at 85.854,99.804 h1.3
  text "Q7" at 31.079,99.704 h1.3
  text "Q7" at 194.579,99.704 h1.3
  text "RE13" at 244.129,98.529 h1.52
  text "CLK" at 178.929,98.426 h1.3
  text "RE" at 139.679,98.379 h1.3
  text "CLK" at 125.079,98.151 h1.3
  text "RE" at 85.829,98.104 h1.3
  text "CLK" at 70.304,98.051 h1.3
  text "CLK" at 233.804,98.051 h1.3
  text "RE" at 31.054,98.004 h1.3
  text "RE" at 194.554,98.004 h1.3
  text "WE13" at 244.129,96.729 h1.52
  text "WE" at 139.654,96.479 h1.3
  text "CLR" at 178.929,96.404 h1.3
  text "WE" at 85.804,96.204 h1.3
  text "CLR" at 125.079,96.129 h1.3
  text "WE" at 31.029,96.104 h1.3
  text "WE" at 194.529,96.104 h1.3
  text "CLR" at 70.304,96.029 h1.3
  text "CLR" at 233.804,96.029 h1.3
  text "RE14" at 244.129,94.654 h1.52
  text "WE14" at 244.129,92.729 h1.52
  text "8bit register 16" at 203.704,81.262 h1.52
  text "8bit register 15" at 150.754,80.837 h1.52
  text "8bit register 13" at 39.479,80.687 h1.52
  text "8bit register 14" at 97.229,80.387 h1.52
  text "+5V" at 214.746,70.279 h1.52 r90
  text "GND" at 218.671,70.179 h1.52 r90
  text "+5V" at 106.171,69.979 h1.52 r90
  text "GND" at 110.096,69.879 h1.52 r90
  text "+5V" at 159.921,69.704 h1.52 r90
  text "GND" at 163.846,69.604 h1.52 r90
  text "+5V" at 51.171,69.379 h1.52 r90
  text "GND" at 55.096,69.279 h1.52 r90
  text "A0" at 245.304,68.654 h1.52
  text "D0" at 179.129,67.929 h1.3
  text "D0" at 233.729,67.829 h1.3
  text "D0" at 124.804,67.629 h1.3
  text "Q0" at 139.904,67.629 h1.3
  text "Q0" at 194.504,67.529 h1.3
  text "D0" at 69.922,67.453 h1.3
  text "Q0" at 85.579,67.329 h1.3
  text "Q0" at 30.697,67.153 h1.3
  text "A1" at 245.304,66.529 h1.52
  text "D1" at 179.129,65.907 h1.3
  text "D1" at 233.729,65.807 h1.3
  text "D1" at 124.804,65.607 h1.3
  text "Q1" at 139.904,65.597 h1.3
  text "Q1" at 194.504,65.497 h1.3
  text "D1" at 69.922,65.431 h1.3
  text "Q1" at 85.579,65.297 h1.3
  text "Q1" at 30.697,65.121 h1.3
  text "A2" at 245.304,64.379 h1.52
  text "D2" at 179.129,63.885 h1.3
  text "D2" at 233.729,63.785 h1.3
  text "D2" at 124.804,63.585 h1.3
  text "Q2" at 139.904,63.565 h1.3
  text "Q2" at 194.504,63.465 h1.3
  text "D2" at 69.922,63.409 h1.3
  text "Q2" at 85.579,63.265 h1.3
  text "Q2" at 30.697,63.089 h1.3
  text "A3" at 245.304,62.429 h1.52
  text "D3" at 179.129,61.862 h1.3
  text "D3" at 233.729,61.762 h1.3
  text "D3" at 124.804,61.562 h1.3
  text "Q3" at 139.904,61.533 h1.3
  text "Q3" at 194.504,61.433 h1.3
  text "D3" at 69.922,61.386 h1.3
  text "Q3" at 85.579,61.233 h1.3
  text "Q3" at 30.697,61.057 h1.3
  text "RE" at 245.304,60.429 h1.52
  text "D4" at 179.129,59.84 h1.3
  text "D4" at 233.729,59.74 h1.3
  text "D4" at 124.804,59.54 h1.3
  text "Q4" at 139.904,59.5 h1.3
  text "Q4" at 194.504,59.4 h1.3
  text "D4" at 69.922,59.364 h1.3
  text "Q4" at 85.579,59.2 h1.3
  text "Q4" at 30.697,59.024 h1.3
  text "WE" at 245.204,58.254 h1.52
  text "D5" at 179.129,57.818 h1.3
  text "D5" at 233.729,57.718 h1.3
  text "D5" at 124.804,57.518 h1.3
  text "Q5" at 139.904,57.468 h1.3
  text "Q5" at 194.504,57.368 h1.3
  text "D5" at 69.922,57.342 h1.3
  text "Q5" at 85.579,57.168 h1.3
  text "Q5" at 30.697,56.992 h1.3
  text "RE15" at 245.154,56.154 h1.52
  text "D6" at 179.129,55.796 h1.3
  text "D6" at 233.729,55.696 h1.3
  text "D6" at 124.804,55.496 h1.3
  text "Q6" at 139.904,55.436 h1.3
  text "Q6" at 194.504,55.336 h1.3
  text "D6" at 69.922,55.32 h1.3
  text "Q6" at 85.579,55.136 h1.3
  text "Q6" at 30.697,54.96 h1.3
  text "WE15" at 244.954,54.254 h1.52
  text "D7" at 179.129,53.773 h1.3
  text "D7" at 233.729,53.673 h1.3
  text "D7" at 124.804,53.473 h1.3
  text "Q7" at 139.904,53.404 h1.3
  text "Q7" at 194.504,53.304 h1.3
  text "D7" at 69.922,53.298 h1.3
  text "Q7" at 85.579,53.104 h1.3
  text "Q7" at 30.697,52.928 h1.3
  text "+5v" at 245.004,52.179 h1.52
  text "CLK" at 179.129,51.751 h1.3
  text "RE" at 139.879,51.704 h1.3
  text "CLK" at 233.729,51.651 h1.3
  text "RE" at 194.479,51.604 h1.3
  text "CLK" at 124.804,51.451 h1.3
  text "RE" at 85.554,51.404 h1.3
  text "CLK" at 69.922,51.275 h1.3
  text "RE" at 30.672,51.228 h1.3
  text "GND" at 245.104,50.279 h1.52
  text "WE" at 139.854,49.804 h1.3
  text "CLR" at 179.129,49.729 h1.3
  text "WE" at 194.454,49.704 h1.3
  text "CLR" at 233.729,49.629 h1.3
  text "WE" at 85.529,49.504 h1.3
  text "CLR" at 124.804,49.429 h1.3
  text "WE" at 30.647,49.328 h1.3
  text "CLR" at 69.922,49.253 h1.3
  text "A0" at 180.021,34.604 h1.52 r90
  text "A1" at 182.196,34.604 h1.52 r90
  text "A2" at 184.296,34.604 h1.52 r90
  text "A3" at 186.296,34.604 h1.52 r90
  text "+5V" at 196.271,34.604 h1.52 r90
  text "GND" at 198.321,34.604 h1.52 r90
  text "WE" at 29.246,34.204 h1.52 r90
  text "Q0" at 31.421,34.204 h1.52 r90
  text "Q7" at 33.521,34.204 h1.52 r90
  text "Q6" at 35.521,34.204 h1.52 r90
  text "Q5" at 37.571,34.204 h1.52 r90
  text "Q4" at 39.596,34.204 h1.52 r90
  text "Q3" at 41.546,34.204 h1.52 r90
  text "Q2" at 43.546,34.204 h1.52 r90
  text "Q1" at 45.496,34.204 h1.52 r90
  text "Q0" at 47.546,34.204 h1.52 r90
  text "D0" at 219.546,33.879 h1.52 r90
  text "D1" at 221.721,33.879 h1.52 r90
  text "D2" at 223.821,33.879 h1.52 r90
  text "D3" at 225.821,33.879 h1.52 r90
  text "Q5" at 227.871,33.879 h1.52 r90
  text "D5" at 229.896,33.879 h1.52 r90
  text "D6" at 231.846,33.879 h1.52 r90
  text "D7" at 233.846,33.879 h1.52 r90
  text "CLK" at 235.796,33.879 h1.52 r90
  text "CLR" at 237.846,33.879 h1.52 r90